# EAGLE board manual_slave (EAGLE 9.3.0)
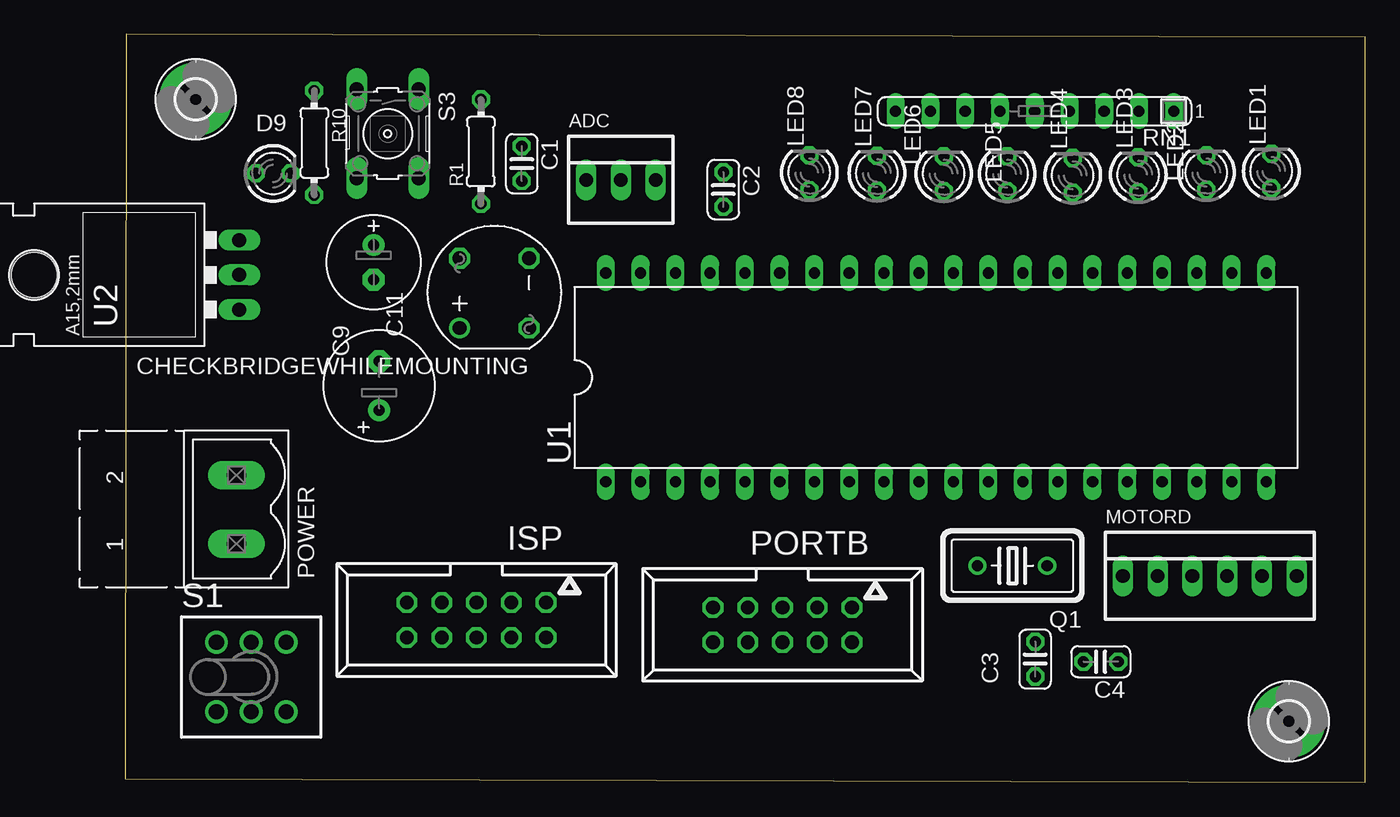
[diagram p0: board, top side]
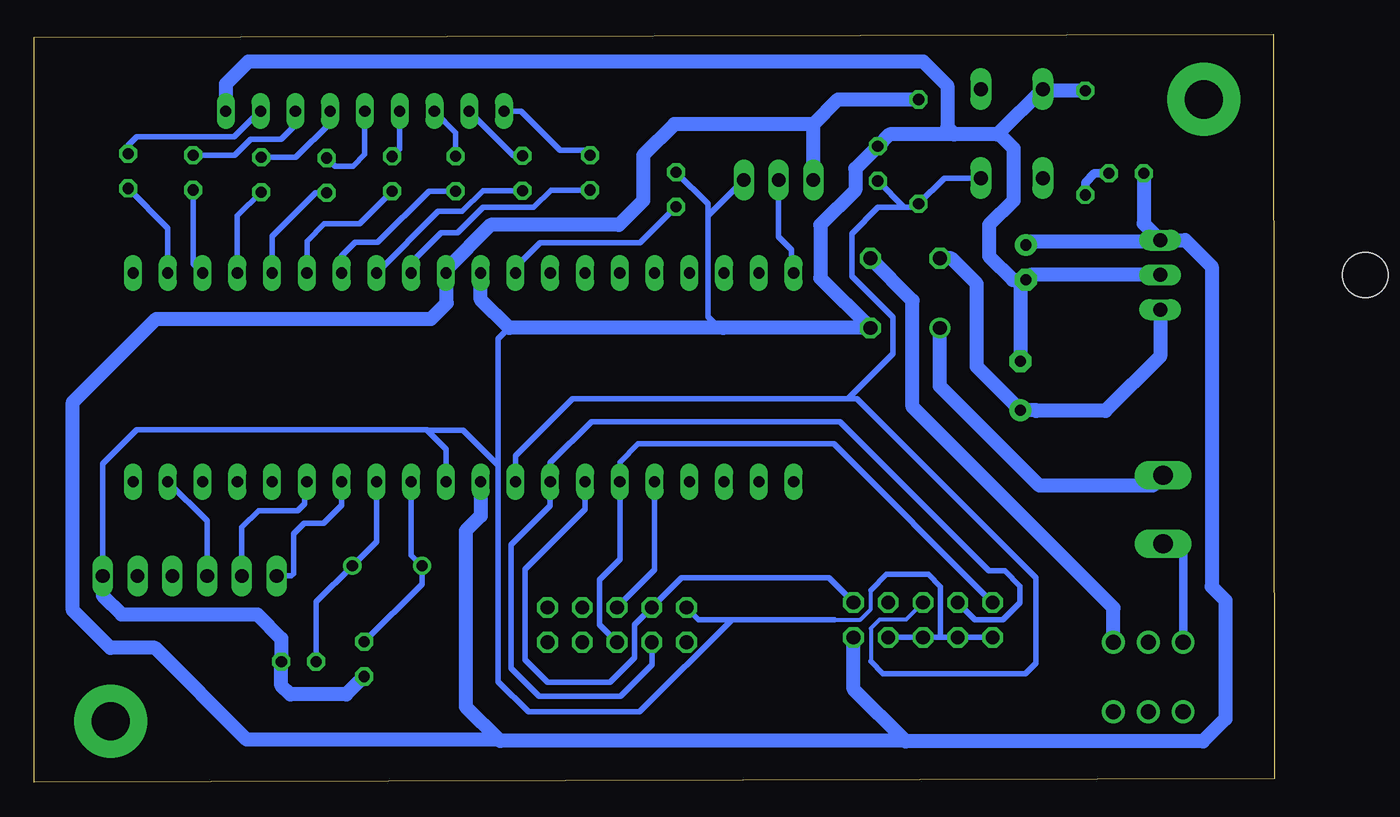
[diagram p1: board, bottom side, seen from below]

Size 90.6 x 54.64 mm. Coordinates in mm from the lower left corner, seen from the top.
Outline: 0,0.29 90.6,0 90.58,54.43 0.06,54.64 0,0.29
Copper layers (1*16): Top 0.035mm / dielectric 1.5mm / Bottom 0.035mm
Design rules "default *": minimum track width 6mil, minimum drill 0.35mm, track to track 6mil, track to pad 6mil, pad to pad 6mil, via to via 6mil, smd to smd 6mil, copper to edge 40mil, drill to drill 6mil, minimum pad ring 10mil, minimum via ring 8mil, stop-mask expansion 10mil, vias tented up to drill 0mil, thermal gap 10mil

## Footprints (pad centres in the part's own frame; a part is rotated, then mirrored left to right if it is on the bottom)
22-23-2031 = drill 1 long: 1 -2.54,0; 2 0,0; 3 2.54,0
C025-024X044 = drill 0.813 octagon: 1 -1.27,0; 2 1.27,0
E3,5-8 = drill 0.813 pad 1.6: + -1.778,0 | drill 0.813 pad 1.6 octagon: - 1.778,0
E2,5-7 = drill 0.813 pad 1.6: + -1.27,0 | drill 0.813 pad 1.6 octagon: - 1.27,0
RB1A = drill 1.016: + -2.54,2.54 | drill 1.016 octagon: - 2.54,-2.54; AC1 2.54,2.54; AC2 -2.54,-2.54
LED3MM = drill 0.813 octagon: A -1.27,0; K 1.27,0
2,8-PAD = drill 2.8 pad 5.334: B2,8 0,0
057-010-1 = drill 1 octagon: 1 -5.08,-1.27; 2 -5.08,1.27; 3 -2.54,-1.27; 4 -2.54,1.27; 5 0,-1.27; 6 0,1.27; 7 2.54,-1.27; 8 2.54,1.27; 9 5.08,-1.27; 10 5.08,1.27
22-23-2061 = drill 1 long: 1 -6.35,0; 2 -3.81,0; 3 -1.27,0; 4 1.27,0; 5 3.81,0; 6 6.35,0
MSTBV2 = drill 1.397 long: 1 -2.5,0; 2 2.5,0
HC18U-V = drill 0.813: 1 -2.54,0; 2 2.54,0
0204/7 = drill 0.813 octagon: 1 -3.81,0; 2 3.81,0
SIL9 = drill 0.813 long: 1 -10.16,0; 2 -7.62,0; 3 -5.08,0; 4 -2.54,0; 5 0,0; 6 2.54,0; 7 5.08,0; 8 7.62,0; 9 10.16,0
TL4XPO = drill 1.1 pad 1.676: 1 -2.54,2.54; 2 0,2.54; 3 2.54,2.54; 4 -2.54,-2.54; 5 0,-2.54; 6 2.54,-2.54
B3F-10XX = drill 1.016 long: 1 -3.251,2.261; 2 3.251,2.261; 3 -3.251,-2.261; 4 3.251,-2.261
DIL40 = drill 0.813 long: 1 -24.13,-7.62; 2 -21.59,-7.62; 3 -19.05,-7.62; 4 -16.51,-7.62; 5 -13.97,-7.62; 6 -11.43,-7.62; 7 -8.89,-7.62; 8 -6.35,-7.62; 9 -3.81,-7.62; 10 -1.27,-7.62; 11 1.27,-7.62; 12 3.81,-7.62; 13 6.35,-7.62; 14 8.89,-7.62; 15 11.43,-7.62; 16 13.97,-7.62; 17 16.51,-7.62; 18 19.05,-7.62; 19 21.59,-7.62; 20 24.13,-7.62; 21 24.13,7.62; 22 21.59,7.62; 23 19.05,7.62; 24 16.51,7.62; 25 13.97,7.62; 26 11.43,7.62; 27 8.89,7.62; 28 6.35,7.62; 29 3.81,7.62; 30 1.27,7.62; 31 -1.27,7.62; 32 -3.81,7.62; 33 -6.35,7.62; 34 -8.89,7.62; 35 -11.43,7.62; 36 -13.97,7.62; 37 -16.51,7.62; 38 -19.05,7.62; 39 -21.59,7.62; 40 -24.13,7.62
78XXL = drill 1.016 long: GND 0,-3.81; IN -2.54,-3.81; OUT 2.54,-3.81 | hole 3.302: 0,11.176

## Placement (x,y rotation side)
ADC  22-23-2031  [22-23-2031]  36.22,44 0 top
C1  0.1 uf  [C025-024X044]  28.97,45.2 270 top
C2  0.1 uf  [C025-024X044]  43.7,43.31 270 top
C3  22uf  [C025-024X044]  66.49,9.01 90 top
C4  22uf  [C025-024X044]  71.27,8.82 180 top
C9  470uf  [E3,5-8]  18.56,28.97 90 top
C11  100uf  [E2,5-7]  18.15,37.98 270 top
CHECKBRIDGEWHILEMOUNTING  [RB1A]  26.98,35.73 90 top
D9  [LED3MM]  10.81,44.48 0 top
H3  MOUNT-PAD-ROUND2.8  [2,8-PAD]  5.16,49.88 0 top
H4  MOUNT-PAD-ROUND2.8  [2,8-PAD]  85.02,4.48 0 top
ISP  057-010-1  [057-010-1]  25.67,11.87 180 top
LED1  [LED3MM]  83.74,44.65 90 top
LED2  [LED3MM]  78.99,44.54 90 top
LED3  [LED3MM]  74.02,44.39 90 top
LED4  [LED3MM]  69.23,44.34 90 top
LED5  [LED3MM]  64.44,44.45 90 top
LED6  [LED3MM]  59.8,44.46 90 top
LED7  [LED3MM]  54.93,44.49 90 top
LED8  [LED3MM]  49.99,44.53 90 top
MOTORD  [22-23-2061]  79.24,15.08 0 top
PORTB  057-010-1  [057-010-1]  48.02,11.51 180 top
POWER  [MSTBV2]  8.13,19.93 90 top
Q1  [HC18U-V]  64.82,15.83 180 top
R1  [0204/7]  25.99,46.07 90 top
R10  [0204/7]  13.82,46.72 270 top
RN1  [SIL9]  66.44,49.02 180 top
S1  TL42PO  [TL4XPO]  9.21,7.7 0 top
S3  [B3F-10XX]  19.19,47.38 270 top
U1  ATmega 32  [DIL40]  59.25,29.58 0 top
U2  7805  [78XXL]  4.53,37.07 90 top

## Library data of the parts
ADC = con-molex; MF: MOLEX; MPN: 22-23-2031; OC_FARNELL: 1462950; OC_NEWARK: 30C0862
C1-C4 = rcl
C9 C11 = rcl; SPICEPREFIX: C
CHECKBRIDGEWHILEMOUNTING = rectifier
D9 LED1-LED8 = led
H3 H4 = holes
ISP PORTB = con-panduit; OC_FARNELL: unknown; OC_NEWARK: unknown
MOTORD = con-molex; MF: MOLEX; MPN: 22-23-2061; OC_FARNELL: 1462922; OC_NEWARK: 27C1933
POWER = con-phoenix-500; OC_FARNELL: unknown; OC_NEWARK: unknown
Q1 = crystal; OC_FARNELL: unknown; OC_NEWARK: unknown
R1 R10 = resistor
RN1 = resistor-sil; OC_FARNELL: unknown; OC_NEWARK: unknown
S1 = switch
S3 = switch-omron; MPN: B3F-1000; OC_FARNELL: 176432; OC_NEWARK: 36M3542
U1 = atmel; MPN: ATMEGA32-16PU; OC_FARNELL: 1661729; OC_NEWARK: 51P1794
U2 = v-reg

## Nets
ADC0: ADC.2 U1.40
GND: ADC.3 C1.1 C2.1 C3.1 C4.1 C9.- C11.- CHECKBRIDGEWHILEMOUNTING.AC2 ISP.4 ISP.6 ISP.8 ISP.10 MOTORD.6 PORTB.9 R10.1 RN1.1 S3.3 U1.11 U1.31 U2.GND
INT0: MOTORD.1 U1.14
INT1: MOTORD.2 U1.15
N$2: CHECKBRIDGEWHILEMOUNTING.- S1.3
N$3: C3.2 Q1.2 U1.12
N$4: C4.2 Q1.1 U1.13
N$6: C2.2 U1.32
N$7: D9.K R10.2
N$8: CHECKBRIDGEWHILEMOUNTING.+ POWER.2
N$9: LED1.K RN1.2
N$10: LED2.K RN1.3
N$11: LED3.K RN1.4
N$12: LED4.K RN1.5
N$13: LED5.K RN1.6
N$14: LED6.K RN1.7
N$15: LED7.K RN1.8
N$16: LED8.K RN1.9
N$17: POWER.1 S1.1
N$23: C9.+ CHECKBRIDGEWHILEMOUNTING.AC1 U2.IN
PA7: U1.33
PB0: U1.1
PB1: U1.2
PB2: U1.3
PB3: U1.4
PB4: PORTB.5 U1.5
PB5: ISP.9 PORTB.6 U1.6
PB6: ISP.1 PORTB.7 U1.7
PB7: ISP.7 PORTB.8 U1.8
PC0: LED1.A U1.22
PC1: LED2.A U1.23
PC2: LED3.A U1.24
PC3: LED4.A U1.25
PC4: LED5.A U1.26
PC5: LED6.A U1.27
PC6: LED7.A U1.28
PC7: LED8.A U1.29
PWM: MOTORD.3 U1.19
RESET: C1.2 ISP.5 R1.1 S3.2 U1.9
VCC: ADC.1 C11.+ D9.A ISP.2 R1.2 U1.10 U1.30 U2.OUT

## Tracks (layer width: path | path; a pad name or v marks a point on that pad's centre or on a via)
ADC0
  Bottom 0.406: ADC.2 36.22,39.86 35.27,38.91 35.27,37.36 U1.40
GND
  Bottom 0.305: 32.15,11.89 30.24,11.89 29.48,12.65 29.48,14.05
  Bottom 0.406: 41.39,41.37 ADC.3 | 41.39,41.37 41.39,42.26 C2.1 | 41.39,41.37 41.39,34.02 40.44,33.06 40.31,33.19 40.27,33.19 | U1.11 60.52,24.35 61.9,25.73 | 56.69,23.17 59.26,25.73 61.9,25.73 | 61.9,25.73 61.91,25.75 83.12,25.75 85.59,23.28 MOTORD.6 | ISP.10 ISP.8 24.4,10.6 | 24.4,10.6 ISP.6 | 26.15,10.6 ISP.6 | ISP.6 ISP.4 | 29.48,14.05 28.34,15.19 25.29,15.19 24.4,14.3 24.4,10.6 | 56.69,23.17 56.69,7.36 54.5,5.16 46.37,5.16 39.64,11.89 | PORTB.9 42.05,11.89 39.64,11.89 | 39.64,11.89 32.15,11.89 | 55.91,33.19 56.69,32.4 56.69,23.17
  Bottom 1.016: C11.- 18.56,36.3 C9.- | U2.GND 17.79,37.07 C11.- | R10.1 16.82,50.52 S3.3 20.16,47.4 | 20.16,47.4 20.24,47.33 23.38,47.33 | 23.38,47.33 28.12,47.33 C1.1 30.62,44.82 30.62,43.26 33.16,40.72 33.16,36.84 CHECKBRIDGEWHILEMOUNTING.AC2 40.27,33.19 55.91,33.19 57.98,35.26 U1.31 | 20.16,47.4 19.06,46.31 19.06,42.5 20.84,40.72 20.84,38.44 19.12,36.71 C11.- | C3.1 67.79,6.43 71.9,6.43 72.54,7.08 C4.1 72.54,10.51 74.31,12.27 84.22,12.27 85.59,13.65 MOTORD.6 | 23.38,47.33 23.89,47.83 23.89,50.88 25.67,52.66 74.94,52.66 76.6,51 RN1.1
INT0
  Bottom 0.406: U1.14 68.14,20.25 69.47,18.91 70.89,18.91 71.66,18.15 71.66,15.24 71.82,15.08 MOTORD.1
INT1
  Bottom 0.406: U1.15 70.86,21.79 70.86,20.35 71.35,19.86 74.21,19.86 75.43,18.63 MOTORD.2
N$2
  Bottom 1.016: CHECKBRIDGEWHILEMOUNTING.- 26.43,35.18 26.43,27.43 11.75,12.74 S1.3
N$3
  Bottom 0.406: C3.2 62.28,14.49 Q1.2 63.06,16.61 U1.12
N$4
  Bottom 0.406: U1.13 65.6,17.59 Q1.1 70,13.18 C4.2
N$6
  Bottom 0.406: 55.44,36.57 U1.32 55.44,37.61 53.65,39.4 46.34,39.4 C2.2
N$7
  Bottom 0.61: R10.2 13.82,43.81 13.15,44.48 D9.K
N$8
  Bottom 1.016: POWER.2 8.89,21.67 17.16,21.67 24.44,28.95 CHECKBRIDGEWHILEMOUNTING.+
N$9
  Bottom 0.406: LED1.K 83.74,46.52 83.11,47.15 76,47.15 74.13,49.02 RN1.2
N$10
  Bottom 0.406: LED2.K 75.95,45.81 74.79,46.97 72.55,46.97 71.52,48 RN1.3
N$11
  Bottom 0.406: RN1.4 68.98,48.16 71.49,45.66 LED3.K
N$12
  Bottom 0.406: RN1.5 66.44,45.87 67.3,45.01 68.63,45.01 LED4.K
N$13
  Bottom 0.406: RN1.6 63.9,46.26 LED5.K
N$14
  Bottom 0.406: RN1.7 59.8,47.46 LED6.K
N$15
  Bottom 0.406: LED7.K 55.56,45.76 RN1.8
N$16
  Bottom 0.406: RN1.9 55.04,49.02 52.2,46.19 50.37,46.19 LED8.K
N$17
  Bottom 0.61: POWER.1 7.42,17.43 6.67,16.68 S1.1
N$23
  Bottom 1.016: CHECKBRIDGEWHILEMOUNTING.AC1 23.6,38.27 21.73,36.4 21.73,30.37 C9.+ 17.45,27.2 17.39,27.13 12.33,27.13 8.34,31.12 U2.IN
PB4
  Bottom 0.406: PORTB.5 45.28,15.52 U1.5
PB5
  Bottom 0.406: PORTB.6 49.29,11.51 49.29,14.81 47.82,16.29 U1.6 47.82,23.4 46.5,24.72 32.17,24.72 ISP.9
PB6
  Bottom 0.406: ISP.1 30.75,13.16 32.53,14.94 43.32,14.94 PORTB.7 46.75,11.51 46.75,9.1 48.53,7.32 53.1,7.32 53.23,7.45 53.42,7.64 54.75,8.97 54.75,15.58 50.36,19.97 U1.7
PB7
  Bottom 0.406: ISP.7 21.88,11.89 19.83,11.89 18.58,13.14 18.58,14.33 19.7,15.45 20.84,15.45 31.73,26.34 49.89,26.34 52.9,23.34 U1.8 52.9,20.22 55.77,17.35 55.77,8.34 53.74,6.3 47.77,6.3 45.48,8.59 PORTB.8
PC0
  Bottom 0.406: LED1.A 80.84,40.48 U1.22
PC1
  Bottom 0.406: LED2.A 78.99,37.9 U1.23
PC2
  Bottom 0.406: LED3.A 75.76,41.38 U1.24
PC3
  Bottom 0.406: LED4.A 70.05,43.07 73.22,39.89 U1.25
PC4
  Bottom 0.406: LED5.A 66.81,40.81 69.4,40.81 70.68,39.53 U1.26
PC5
  Bottom 0.406: LED6.A 61.76,43.19 65.51,39.44 67.16,39.44 68.14,38.46 U1.27
PC6
  Bottom 0.406: U1.28 61.08,41.72 59.32,41.72 57.82,43.22 LED7.A
PC7
  Bottom 0.406: U1.29 63.06,37.97 60.89,40.14 59.65,40.14 57.8,41.99 54.12,41.99 52.84,43.26 LED8.A
PWM
  Bottom 0.406: U1.19 77.97,19.1 MOTORD.3
RESET
  Bottom 0.305: ISP.5 26.91,11.89 28.84,11.89 29.48,11.26 29.48,8.84
  Bottom 0.406: U1.9 55.44,23.86 51.27,28.02 31.13,28.02 | S3.2 24.11,44.13 R1.1 26.23,42.02 27.06,42.02 | 29.48,8.84 28.59,7.96 18.18,7.96 17.41,8.72 17.41,14.94 30.49,28.02 31.13,28.02 | 31.13,28.02 31.13,28.05 27.88,31.3 27.88,33.98 30.88,36.97 30.88,40.09 28.95,42.02 27.06,42.02 | C1.2 27.06,42.02
VCC
  Bottom 1.016: C11.+ 17.92,39.48 8.47,39.48 U2.OUT | U2.OUT 6.52,39.61 4.59,37.67 4.59,14.3 3.57,13.29 3.57,4.65 5.22,3 26.94,3 26.97,3.03 | 26.97,3.03 30.75,6.81 ISP.2 | ADC.1 33.68,48.08 | R1.2 31.88,49.88 33.68,48.08 | 33.68,48.08 43.84,48.08 46.12,45.8 46.12,42.5 47.89,40.72 57.25,40.72 60.52,37.46 | 26.97,3.03 56.56,3.03 56.66,3.13 | 56.66,3.13 75.07,3.13 81.78,9.83 85.04,9.83 87.77,12.57 87.77,27.77 81.68,33.86 61.61,33.86 60.47,35.01 60.47,37.41 60.52,37.46 | U1.10 57.98,19.46 59.07,18.37 59.07,5.54 56.66,3.13 | U2.OUT 9.54,40.8 D9.A | 60.52,37.46 U1.30